# EAGLE board SysnapseWriless-BOB-v11g (EAGLE 5.11)
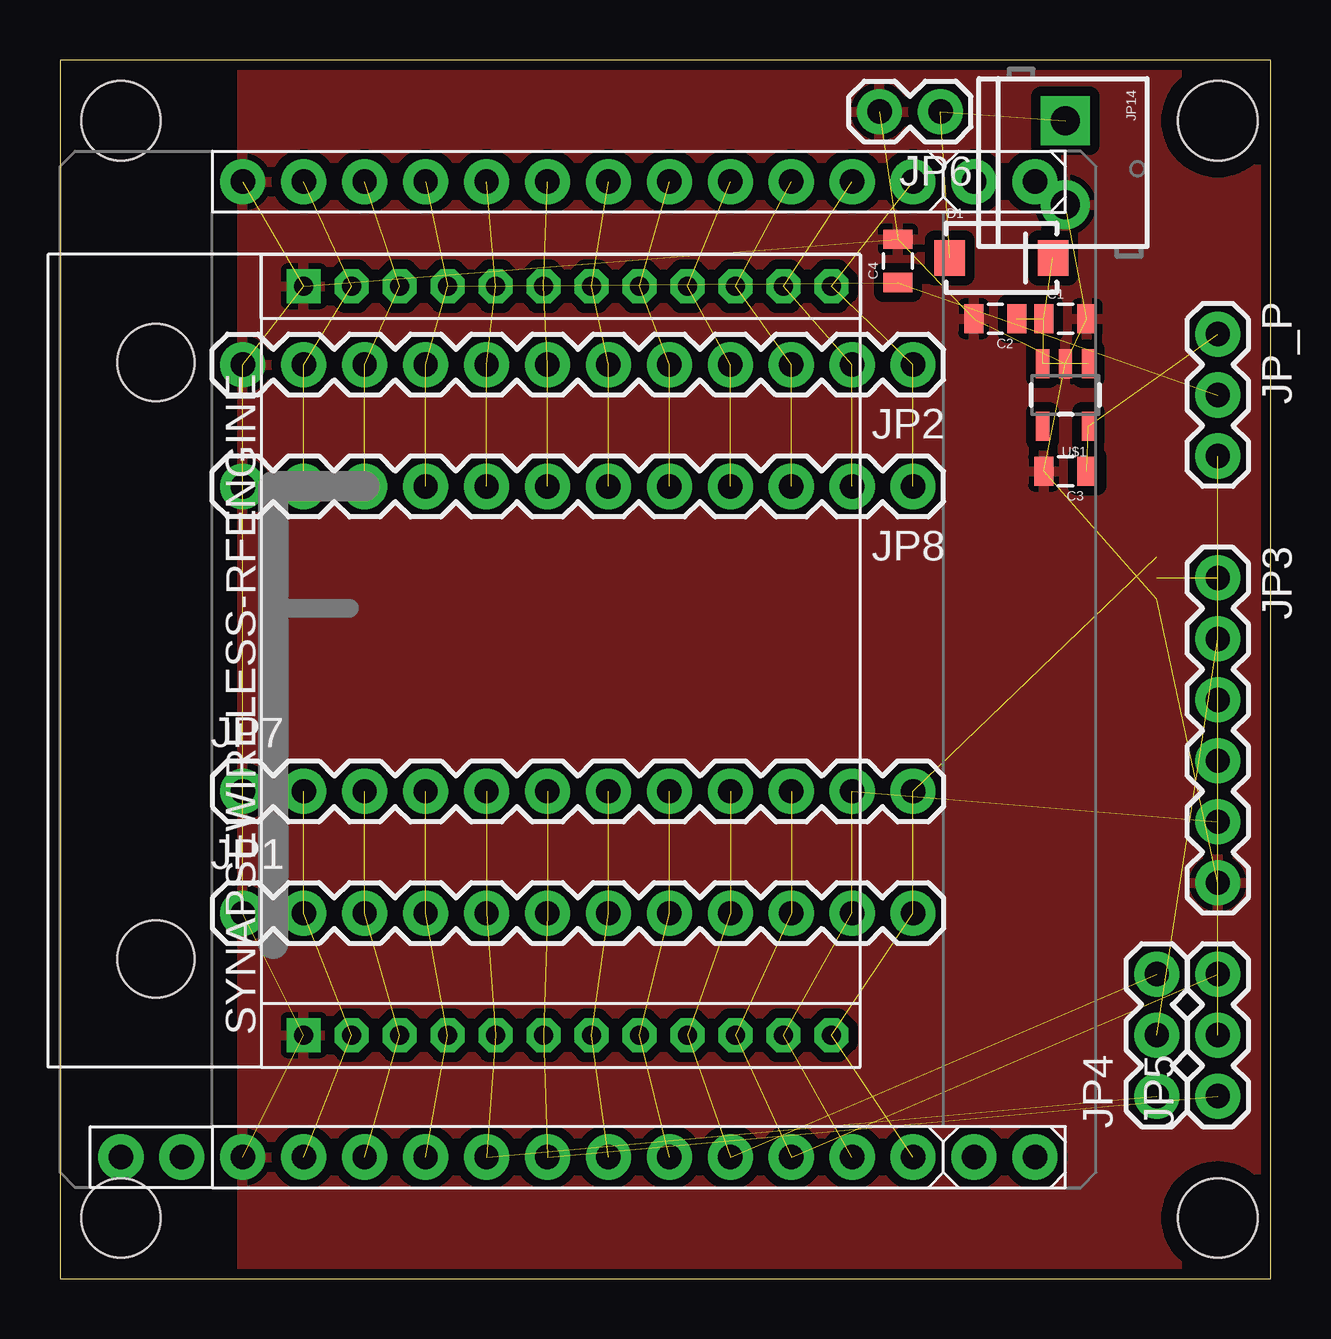
[diagram p0: board, top side]
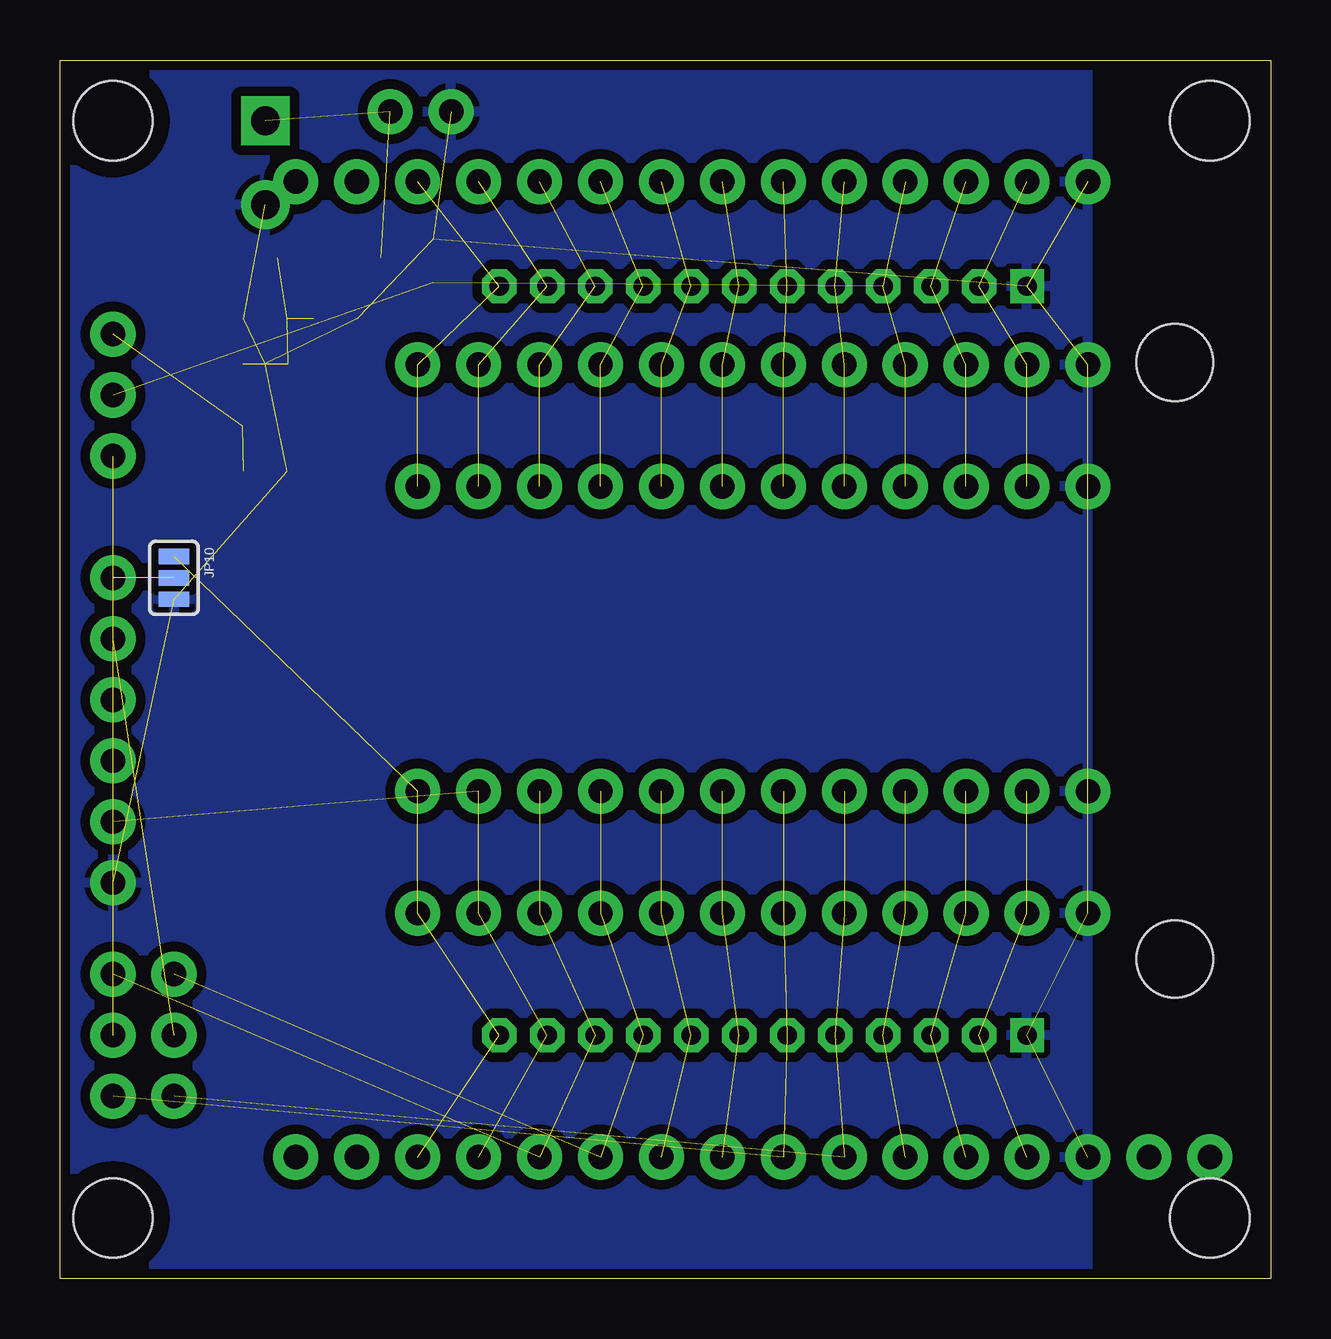
[diagram p1: board, bottom side, seen from below]

Size 50.47 x 50.79 mm. Coordinates in mm from the lower left corner, seen from the top.
Outline: 0,0 50.47,0 50.47,50.79 0,50.79 0,0
Copper layers (1*16): Top 0.0356mm / dielectric 1.5011mm / Bottom 0.0356mm
Design rules "LaenPCBOrder-JCModified": minimum track width 6mil, minimum drill 13mil, track to track 6mil, track to pad 6mil, pad to pad 6mil, via to via 6mil, smd to smd 6mil, copper to edge 15mil, drill to drill 6mil, minimum pad ring 12mil, minimum via ring 7mil, stop-mask expansion 4mil, vias tented up to drill 25mil, thermal gap 10mil
Net classes: 0 default: width 0.254 mm

## Footprints (pad centres in the part's own frame; a part is rotated, then mirrored left to right if it is on the bottom)
0805 = smd 0.8 x 1.2: 1 -0.9,0; 2 0.9,0
SMA-DIODE = smd 1.27 x 1.47: A -2.15,0; C 2.15,0
1X12 = drill 1.016 pad 1.88 round: 1 0,0; 2 2.54,0; 3 5.08,0; 4 7.62,0; 5 10.16,0; 6 12.7,0; 7 15.24,0; 8 17.78,0; 9 20.32,0; 10 22.86,0; 11 25.4,0; 12 27.94,0
1X06 = drill 1.016 pad 1.88 round: 1 0,0; 2 2.54,0; 3 5.08,0; 4 7.62,0; 5 10.16,0; 6 12.7,0
1X03 = drill 1.016 pad 1.88 round: 1 0,0; 2 2.54,0; 3 5.08,0
1X02 = drill 1.016 pad 1.88 round: 1 0,0; 2 2.54,0
STAND-OFF = hole 3.302: 0,0
SJ_3 = smd 0.635 x 1.27: 1 -0.889,0; 2 0,0; 3 0.889,0
SCREWTERMINAL-3.5MM-2 = drill 1.2 pad 2.032 square: 1 0,0 | drill 1.2 pad 2.032 round: 2 3.5,0
SYNAPSERFENGINE-THM-SILKTPLACE = drill 0.8 square: 1 0,0; 24 31.2,0 | drill 0.8 pad 1.422 octagon: 2 0,-2; 3 0,-4; 4 0,-6; 5 0,-8; 6 0,-10; 7 0,-12; 8 0,-14; 9 0,-16; 10 0,-18; 11 0,-20; 12 0,-22; 13 31.2,-22; 14 31.2,-20; 15 31.2,-18; 16 31.2,-16; 17 31.2,-14; 18 31.2,-12; 19 31.2,-10; 20 31.2,-8; 21 31.2,-6; 22 31.2,-4; 23 31.2,-2 | hole 3.2: 3.17,6.16; 28.03,6.16
SOT23-5 = smd 0.55 x 1.2: 1 -0.95,-1.3; 2 0,-1.3; 3 0.95,-1.3; 4 0.95,1.3; 5 -0.95,1.3
SYNSJ-STACK = drill 1.016 pad 1.88 round: G0 0,-7.62; G1 0,-10.16; G2 0,-12.7; G3 0,-15.24; G4 0,-17.78; G5 0,-20.32; G6 0,-22.86; G7 0,-25.4; G8 0,-27.94; G9 0,-30.48; G10 0,-33.02; G11 40.64,-33.02; G12 40.64,-30.48; G13 40.64,-27.94; G14 40.64,-25.4; G15 40.64,-22.86; G16 40.64,-20.32; G17 40.64,-17.78; G18 40.64,-15.24; GND 0,-5.08; GND1 40.64,-5.08; R1 0,0; R2 0,-2.54; R3 0,-35.56; R4 0,-38.1; R5 40.64,-38.1; R6 40.64,-35.56; RESERVED 40.64,-10.16; RESET 40.64,-7.62; VCC 40.64,-12.7

## Placement (x,y rotation side)
C1  1uF  [0805]  41.91,40.01 0 top
C2  100nf  [0805]  38.99,40.01 180 top
C3  1uF  [0805]  41.91,33.66 180 top
C4  10uF  [0805]  34.92,42.42 90 top
D1  [SMA-DIODE]  39.24,42.55 0 top
JP1  M12PTH  [1X12]  7.62,15.24 0 top
JP2  M12PTH  [1X12]  35.56,38.1 180 top
JP3  [1X06]  48.26,29.21 270 top
JP4  JUMPER-3PTH  [1X03]  45.72,7.62 90 top
JP5  JUMPER-3PTH  [1X03]  48.26,7.62 90 top
JP6  [1X02]  36.7,48.64 180 top
JP7  M12PTH  [1X12]  7.62,20.32 0 top
JP8  M12PTH  [1X12]  35.56,33.02 180 top
JP9  STAND-OFF  [STAND-OFF]  2.54,2.54 0 top
JP10  JUMPER-3SMD  [SJ_3]  45.72,29.21 270 bottom
JP11  STAND-OFF  [STAND-OFF]  2.54,48.26 0 top
JP12  STAND-OFF  [STAND-OFF]  48.26,48.26 0 top
JP13  STAND-OFF  [STAND-OFF]  48.26,2.54 0 top
JP14  [SCREWTERMINAL-3.5MM-2]  41.91,48.26 270 top
JP_P  JUMPER-3PTH  [1X03]  48.26,39.37 270 top
SYNAPSEWIRELESS-RFENGINE  SYNAPSEWIRELESS-RFENGINESTD  [SYNAPSERFENGINE-THM-SILKTPLACE]  10.16,10.16 90 top
U$1  MCP1802  [SOT23-5]  41.91,36.83 180 top
U$2  SYNAPSE-SJ-STCKINGD30-1600  [SYNSJ-STACK]  2.54,5.08 90 top

## Library data of the parts
C1-C4 D1 SYNAPSEWIRELESS-RFENGINE U$1 U$2 = 0_jc-custom
JP1-JP14 JP_P = SparkFun

## Nets
GND: C1.2 C2.2 C3.2 C4.2 JP1.1 JP2.12 JP3.6 JP6.2 JP7.1 JP8.12 JP10.3 JP14.2 SYNAPSEWIRELESS-RFENGINE.1 SYNAPSEWIRELESS-RFENGINE.24 U$1.2 U$2.GND U$2.GND1
GPIO0: JP1.2 JP7.2 SYNAPSEWIRELESS-RFENGINE.2 U$2.G0
GPIO1: JP1.3 JP7.3 SYNAPSEWIRELESS-RFENGINE.3 U$2.G1
GPIO2: JP1.4 JP7.4 SYNAPSEWIRELESS-RFENGINE.4 U$2.G2
GPIO3: JP1.5 JP4.1 JP7.5 SYNAPSEWIRELESS-RFENGINE.5 U$2.G3
GPIO4: JP1.6 JP5.1 JP7.6 SYNAPSEWIRELESS-RFENGINE.6 U$2.G4
GPIO5: JP1.7 JP7.7 SYNAPSEWIRELESS-RFENGINE.7 U$2.G5
GPIO6: JP1.8 JP7.8 SYNAPSEWIRELESS-RFENGINE.8 U$2.G6
GPIO7: JP1.9 JP4.3 JP7.9 SYNAPSEWIRELESS-RFENGINE.9 U$2.G7
GPIO8: JP1.10 JP5.3 JP7.10 SYNAPSEWIRELESS-RFENGINE.10 U$2.G8
GPIO9: JP1.11 JP3.5 JP7.11 SYNAPSEWIRELESS-RFENGINE.11 U$2.G9
GPIO10: JP1.12 JP7.12 JP10.1 SYNAPSEWIRELESS-RFENGINE.12 U$2.G10
GPIO11: JP2.1 JP8.1 SYNAPSEWIRELESS-RFENGINE.13 U$2.G11
GPIO12: JP2.2 JP8.2 SYNAPSEWIRELESS-RFENGINE.14 U$2.G12
GPIO13: JP2.3 JP8.3 SYNAPSEWIRELESS-RFENGINE.15 U$2.G13
GPIO14: JP2.4 JP8.4 SYNAPSEWIRELESS-RFENGINE.16 U$2.G14
GPIO15: JP2.5 JP8.5 SYNAPSEWIRELESS-RFENGINE.17 U$2.G15
GPIO16: JP2.6 JP8.6 SYNAPSEWIRELESS-RFENGINE.18 U$2.G16
GPIO17: JP2.7 JP8.7 SYNAPSEWIRELESS-RFENGINE.19 U$2.G17
GPIO18: JP2.8 JP8.8 SYNAPSEWIRELESS-RFENGINE.20 U$2.G18
N$1: C1.1 C2.1 D1.C U$1.1 U$1.3
N$3: JP2.10 JP8.10 SYNAPSEWIRELESS-RFENGINE.22 U$2.RESERVED
N$7: JP3.1 JP10.2
RESET_L: JP2.11 JP8.11 SYNAPSEWIRELESS-RFENGINE.23 U$2.RESET
RXI: JP3.2 JP4.2
TXO: JP3.3 JP5.2
VCC: C4.1 JP2.9 JP8.9 JP_P.2 SYNAPSEWIRELESS-RFENGINE.21 U$2.VCC
VCC_FTDI: JP3.4 JP_P.3
VCC_REG: C3.1 JP_P.1 U$1.5
VIN: D1.A JP6.1 JP14.1

## Tracks (layer width: path | path; a pad name or v marks a point on that pad's centre or on a via)
GND  (16 unrouted)
  pour Bottom (isolate 0.406): 7.62,50.8 50.8,50.8 50.8,0 7.62,0
  pour Top (isolate 0.406): 7.62,50.8 50.8,50.8 50.8,0 7.62,0
GPIO0  (3 unrouted)
GPIO1  (3 unrouted)
GPIO2  (3 unrouted)
GPIO3  (4 unrouted)
GPIO4  (4 unrouted)
GPIO5  (3 unrouted)
GPIO6  (3 unrouted)
GPIO7  (4 unrouted)
GPIO8  (4 unrouted)
GPIO9  (4 unrouted)
GPIO10  (4 unrouted)
GPIO11  (3 unrouted)
GPIO12  (3 unrouted)
GPIO13  (3 unrouted)
GPIO14  (3 unrouted)
GPIO15  (3 unrouted)
GPIO16  (3 unrouted)
GPIO17  (3 unrouted)
GPIO18  (3 unrouted)
N$1  (4 unrouted)
N$3  (3 unrouted)
N$7  (1 unrouted)
RESET_L  (3 unrouted)
RXI  (1 unrouted)
TXO  (1 unrouted)
VCC  (5 unrouted)
VCC_FTDI  (1 unrouted)
VCC_REG  (2 unrouted)
VIN  (2 unrouted)

## Text on the board
tDocu: + | VREG | VCC | FTDI | RXI | TXO | VCC | CTS | GND | Synapse-BOB Rev1f | 1 | UART | 0 | RX | TX
bDocu: + | VIN | 20100928 | 2.7-3.4 | GND | RESET_L | PTG0/BKDG | VCC | GPIO18_AD0 | GPIO17_AD1 | GPIO16_AD2 | GPIO15_AD3 | GPIO14_AD4 | GPIO13_AD5 | GPIO12_AD6 | GPIO11_AD7 | GND | GPIO0 | GPIO1 | GPIO2 | RX0 | TX0 | 5_CTS0 | 6_RTS0 | 7_RX1 | 8_TX1 | 9_CTS1 | 10_RTS1 | J.C. Woltz